# EAGLE board untitled (EAGLE 6.0)
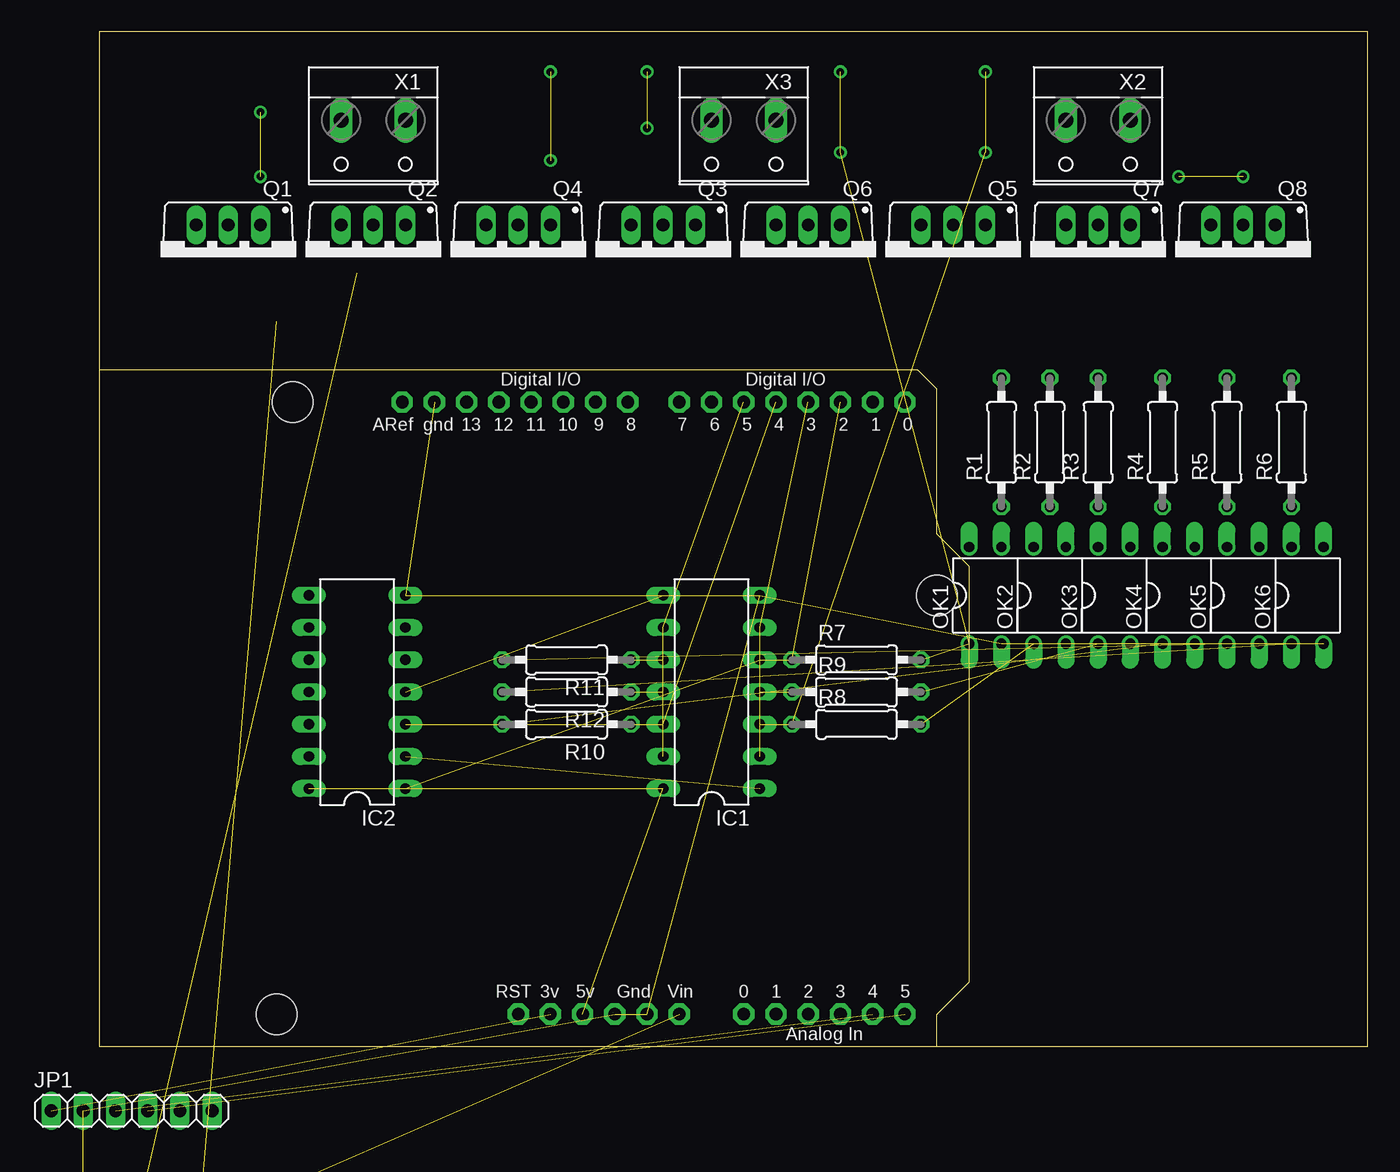
[diagram p0: board, top side]
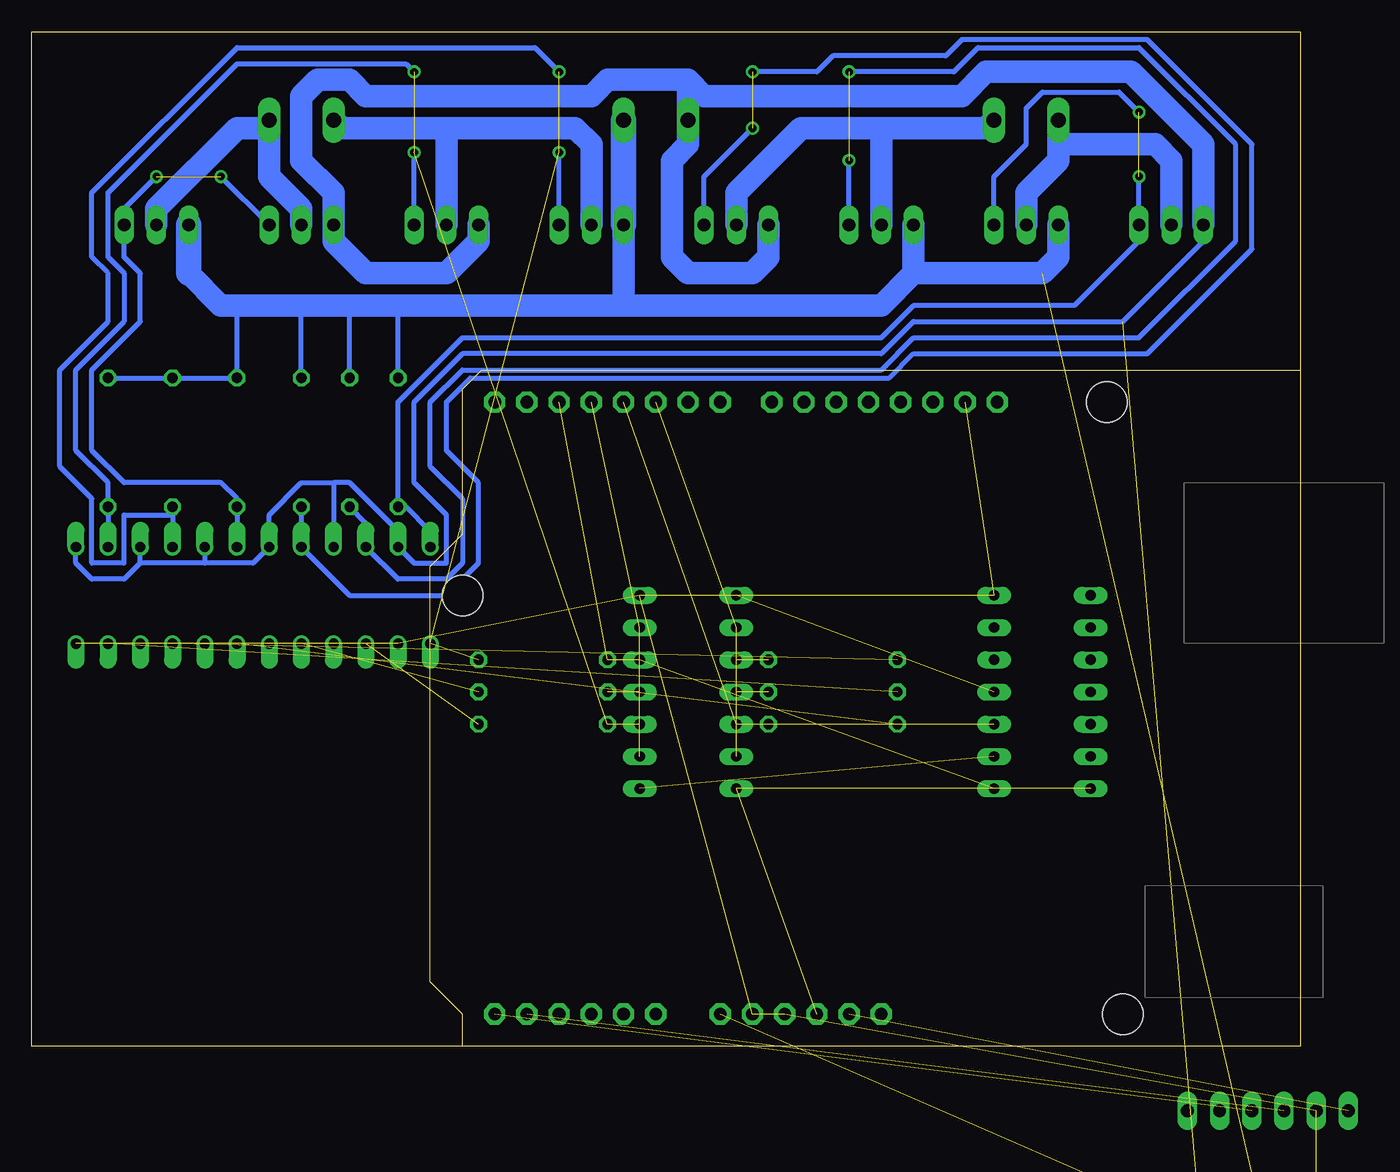
[diagram p1: board, bottom side, seen from below]

Size 100 x 80 mm. Coordinates in mm from the lower left corner, seen from the top.
Outline: 100,0 100,80 0,80 0,0 100,0
Copper layers (1*16): Top 0.035mm / dielectric 1.5mm / Bottom 0.035mm
Design rules: minimum track width 10mil, minimum drill 24mil, track to track 8mil, track to pad 8mil, pad to pad 8mil, via to via 8mil, smd to smd 8mil, copper to edge 40mil, drill to drill 8mil, minimum pad ring 10mil, minimum via ring 8mil, stop-mask expansion 4mil, vias tented up to drill 0mil, thermal gap 10mil

## Footprints (pad centres in the part's own frame; a part is rotated, then mirrored left to right if it is on the bottom)
E7,5-18 = drill 1.016 pad 3.15: + -3.81,0 | drill 1.016 pad 3.15 octagon: - 3.81,0
DIL14 = drill 0.813 long: 1 -7.62,-3.81; 2 -5.08,-3.81; 3 -2.54,-3.81; 4 0,-3.81; 5 2.54,-3.81; 6 5.08,-3.81; 7 7.62,-3.81; 8 7.62,3.81; 9 5.08,3.81; 10 2.54,3.81; 11 0,3.81; 12 -2.54,3.81; 13 -5.08,3.81; 14 -7.62,3.81
1X06 = drill 1.016 long: 1 -6.35,0; 2 -3.81,0; 3 -1.27,0; 4 1.27,0; 5 3.81,0; 6 6.35,0
1X02 = drill 1.016 long: 1 -1.27,0; 2 1.27,0
DIL04 = drill 0.813 offset: 1 -1.27,-3.81; 2 1.27,-3.81; 3 1.27,3.81; 4 -1.27,3.81
TO220BV = drill 1.016 long: D 0,-2.54; G -2.54,-2.54; S 2.54,-2.54
0207/10 = drill 0.813 octagon: 1 -5.08,0; 2 5.08,0
ARDUINO = drill 1 pad 1.676 octagon: 3V 35.56,2.54; 5V 38.1,2.54; A0 50.8,2.54; A1 53.34,2.54; A2 55.88,2.54; A3 58.42,2.54; A4 60.96,2.54; A5 63.5,2.54; AREF 23.876,50.8; D0 63.5,50.8; D1 60.96,50.8; D2 58.42,50.8; D3 55.88,50.8; D4 53.34,50.8; D5 50.8,50.8; D6 48.26,50.8; D7 45.72,50.8; D8 41.656,50.8; D9 39.116,50.8; D10 36.576,50.8; D11 34.036,50.8; D12 31.496,50.8; D13 28.956,50.8; GND 26.416,50.8; GND1 43.18,2.54; GND2 40.64,2.54; RESET 33.02,2.54; VIN 45.72,2.54 | hole 3.2: 15.24,50.8; 66.04,35.56; 13.97,2.54
W237-132 = drill 1.194 long: 1 -2.54,-0.635; 2 2.54,-0.635

## Placement (x,y rotation side)
C1  [E7,5-18]  2.54,-31.75 0 top  (outside the outline)
IC1  4081N  [DIL14]  48.26,27.94 90 top
IC2  4069N  [DIL14]  20.32,27.94 90 top
JP1  Gyro  [1X06]  2.54,-5.08 0 top  (outside the outline)
JP3  9V Batt  [1X02]  -2.54,-19.05 0 top  (outside the outline)
OK1  PC817  [DIL04]  69.85,35.56 0 top
OK2  PC817  [DIL04]  74.93,35.56 0 top
OK3  PC817  [DIL04]  80.01,35.56 0 top
OK4  PC817  [DIL04]  85.09,35.56 0 top
OK5  PC817  [DIL04]  90.17,35.56 0 top
OK6  PC817  [DIL04]  95.25,35.56 0 top
Q1  IRFZ48V  [TO220BV]  10.16,62.23 180 top
Q2  IRF4905V  [TO220BV]  21.59,62.23 180 top
Q3  IRFZ48V  [TO220BV]  44.45,62.23 180 top
Q4  IRF4905V  [TO220BV]  33.02,62.23 180 top
Q5  IRFZ48V  [TO220BV]  67.31,62.23 180 top
Q6  IRF4905V  [TO220BV]  55.88,62.23 180 top
Q7  IRFZ48V  [TO220BV]  78.74,62.23 180 top
Q8  IRF4905V  [TO220BV]  90.17,62.23 180 top
R1  10k  [0207/10]  71.12,47.62 90 top
R2  10k  [0207/10]  74.93,47.62 90 top
R3  10k  [0207/10]  78.74,47.62 90 top
R4  10k  [0207/10]  83.82,47.62 90 top
R5  10k  [0207/10]  88.9,47.62 90 top
R6  10k  [0207/10]  93.98,47.62 90 top
R7  [0207/10]  59.69,30.48 0 top
R8  [0207/10]  59.69,25.4 0 top
R9  [0207/10]  59.69,27.94 0 top
R10  [0207/10]  36.83,25.4 180 top
R11  [0207/10]  36.83,30.48 180 top
R12  [0207/10]  36.83,27.94 180 top
U$1  ARDUINOUNO  [ARDUINO]  0,0 0 top
X1  [W237-132]  21.59,72.39 180 top
X2  [W237-132]  78.74,72.39 180 top
X3  24V Batt  [W237-132]  50.8,72.39 180 top

## Library data of the parts
C1 R1-R12 = rcl
IC1 IC2 = 40xx
JP1 JP3 = pinhead
OK1-OK6 = optocoupler; MPN: PC817X4J000F; OC_FARNELL: 9707727; OC_NEWARK: 97K7059
Q1-Q8 = transistor-power
U$1 = adafruit
X1-X3 = con-wago-508; OC_FARNELL: unknown; OC_NEWARK: unknown

## Nets
GND: IC1.7 IC2.7 JP1.2 JP3.2 OK1.2 OK2.2 OK3.2 OK4.2 OK5.2 OK6.2 U$1.GND U$1.GND1 U$1.GND2
N$1: Q5.D Q6.D X2.2
N$2: Q3.D Q4.D X1.1
N$3: OK2.1 R8.2
N$4: Q1.D Q2.D X1.2
N$5: OK4.1 R10.2
N$7: IC1.9 IC1.13 U$1.D5
N$8: IC1.1 IC2.2
N$9: OK2.4 Q4.G R2.1
N$10: IC1.5 IC2.1 R7.1 U$1.D2
N$11: IC1.2 IC1.6 U$1.D3
N$12: OK1.4 Q1.G Q2.G R1.1
N$13: OK3.4 Q3.G R3.1
N$14: OK3.1 R9.2
N$15: IC1.3 R8.1
N$16: IC1.8 IC2.4
N$17: IC1.4 R9.1
N$18: Q7.D Q8.D X2.1
N$19: OK4.4 Q7.G Q8.G R4.1
N$20: OK5.1 R11.2
N$21: OK5.4 Q6.G R5.1
N$22: OK6.4 Q5.G R6.1
N$23: OK6.1 R12.2
N$24: IC1.10 R11.1
N$25: IC1.11 R12.1
N$26: JP1.4 U$1.A5
N$27: IC1.12 IC2.3 R10.1 U$1.D4
N$28: OK1.1 R7.2
N$29: C1.- OK1.3 OK2.3 OK3.3 OK4.3 OK5.3 OK6.3 Q1.S Q3.S Q5.S Q7.S X3.2
N$30: C1.+ Q2.S Q4.S Q6.S Q8.S R1.2 R2.2 R3.2 R4.2 R5.2 R6.2 X3.1
N$35: JP1.1 U$1.3V
N$37: JP1.3 U$1.A4
N$39: JP3.1 U$1.VIN
VCC: IC1.14 IC2.14 U$1.5V

## Tracks (layer width: path | path; a pad name or v marks a point on that pad's centre or on a via)
GND  (12 unrouted)
N$1
  Bottom 1.778: Q6.D 55.88,71.12 57.15,72.39 67.31,72.39 | 67.31,72.39 75.56,72.39 X2.2 | Q5.D 67.31,72.39
N$2
  Bottom 1.778: Q4.D 33.02,72.39 | Q3.D 44.45,67.31 39.37,72.39 33.02,72.39 | X1.1 24.77,72.39 33.02,72.39
N$3  (1 unrouted)
N$4
  Bottom 1.778: Q2.D 21.59,67.31 19.05,69.85 19.05,71.12 | 19.05,71.12 X1.2 | Q1.D 10.16,69.85 11.43,71.12 19.05,71.12
N$5  (1 unrouted)
N$7  (2 unrouted)
N$8  (1 unrouted)
N$9  (via drill 0.6)  (1 unrouted)
  Bottom 0.406: v35.56,76.83 27.3,76.83 25.4,78.74 12.7,78.74 5.08,71.12 5.08,63.5 12.7,55.88 30.48,55.88 33.02,53.34 66.04,53.34 68.58,50.8 68.58,45.72 66.04,43.18 66.04,38.1 67.31,36.83 71.12,36.83 OK2.4 73.66,41.27 R2.1 | Q4.G 35.56,69.85
N$10  (3 unrouted)
N$11  (2 unrouted)
N$12  (via drill 0.6)  (1 unrouted)
  Bottom 0.406: Q2.G 24.13,68.58 21.59,71.12 21.59,73.98 20.32,75.25 14.29,75.25 v12.7,73.66 | v12.7,68.58 Q1.G 12.7,63.5 17.78,58.42 30.48,58.42 33.02,55.88 66.04,55.88 71.12,50.8 R1.1 70.48,42.55 68.58,40.64 OK1.4
N$13  (via drill 0.6)  (1 unrouted)
  Bottom 0.406: R3.1 OK3.4 74.93,35.56 67.31,35.56 64.77,38.1 64.77,44.45 67.31,46.99 67.31,50.8 65.41,52.7 32.38,52.7 30.48,54.61 12.06,54.61 3.81,62.87 3.81,71.12 12.06,79.38 26.67,79.38 27.94,78.11 36.83,78.11 38.1,76.83 v43.18,76.83 | Q3.G 46.99,68.58 43.18,72.39
N$14  (1 unrouted)
N$15  (via drill 0.6)  (2 unrouted)
  other vias: 69.85,70.48
N$16  (1 unrouted)
N$17  (1 unrouted)
N$18
  Bottom 1.778: Q7.D 78.74,66.04 81.28,68.58 81.28,72.39 | Q8.D 90.17,66.04 83.82,72.39 81.28,72.39 | 81.28,72.39 X2.1
N$19  (via drill 0.6)  (1 unrouted)
  Bottom 0.406: OK4.4 R4.1 83.82,43.18 85.09,44.45 92.71,44.45 95.25,46.99 95.25,53.34 91.44,57.15 91.44,60.96 92.71,62.23 Q8.G 92.71,66.04 v90.17,68.58 | Q7.G v85.09,68.58
N$20  (1 unrouted)
N$21  (1 unrouted)
  Bottom 0.406: 58.42,76.83 60.33,78.74 83.82,78.74 95.25,67.31 95.25,62.23 93.98,60.96 93.98,57.15 97.79,53.34 97.79,45.72 95.25,43.18 95.25,38.1 92.71,38.1 92.71,41.91 88.9,41.91 | Q6.G 58.42,70.48 | R5.1 88.9,41.91 | 88.9,41.91 OK5.4
N$22  (1 unrouted)
  Bottom 0.406: 69.85,76.83 70.48,77.47 83.82,77.47 93.98,67.31 93.98,62.23 92.71,60.96 92.71,57.15 96.52,53.34 96.52,46.99 93.98,44.45 R6.1 OK6.4 | Q5.G 69.85,70.48
N$23  (1 unrouted)
N$24  (1 unrouted)
N$25  (1 unrouted)
N$26  (1 unrouted)
N$27  (3 unrouted)
N$28  (via drill 0.6)  (2 unrouted)
  other vias: 58.42,70.48
N$29  (1 unrouted)
  Bottom 0.406: Q1.S 7.62,63.5 13.97,57.15 30.48,57.15 33.02,54.61 66.04,54.61 69.85,50.8 69.85,44.45 67.31,41.91 67.31,38.1 69.85,38.1 OK1.3 71.12,40.64 74.93,44.45 76.2,44.45 | 76.2,44.45 OK2.3 | 76.2,44.45 78.74,44.45 81.28,41.91 OK3.3 82.55,38.1 86.36,38.1 | 86.36,38.1 91.44,38.1 | 91.44,38.1 OK5.3 | OK4.3 86.36,38.1 | 91.44,38.1 92.71,36.83 95.25,36.83 96.52,38.1 OK6.3
  Bottom 1.778: Q5.S 64.77,63.5 67.31,60.96 73.66,60.96 76.2,63.5 Q7.S 76.2,67.31 78.74,69.85 78.74,74.93 77.47,76.2 74.93,76.2 73.66,74.93 55.88,74.93 54.61,76.2 48.26,76.2 | X3.2 48.26,73.66 | Q1.S 7.62,71.12 13.34,76.83 24.77,76.83 26.67,74.93 46.99,74.93 48.26,76.2 | 48.26,76.2 X3.2 | X3.2 48.26,71.12 49.53,69.85 49.53,62.23 48.26,60.96 43.18,60.96 41.91,62.23 Q3.S
N$30  (1 unrouted)
  Bottom 0.406: R6.2 R5.2 84.45,52.7 83.82,53.34 | R1.2 71.12,58.42 | R2.2 74.93,58.42 | R3.2 78.74,58.42 | R4.2 83.82,53.34 | 83.82,53.34 83.82,58.42
  Bottom 1.778: 87.63,60.96 85.09,58.42 83.82,58.42 78.74,58.42 74.93,58.42 71.12,58.42 53.34,58.42 | 30.48,60.96 20.32,60.96 19.05,62.23 Q2.S | Q4.S 30.48,60.96 | 30.48,60.96 33.02,58.42 53.34,58.42 | Q6.S 53.34,58.42
  Bottom 2: 87.63,60.96 Q8.S | X3.1 Q6.S
N$31  (via drill 0.6)
  other vias: 58.42,76.83
N$32  (via drill 0.6)
  other vias: 69.85,76.83
N$33  (via drill 0.6)
  other vias: 35.56,69.85
N$34  (via drill 0.6)
  other vias: 43.18,72.39
N$35  (1 unrouted)
N$37  (1 unrouted)
N$39  (1 unrouted)
VCC  (2 unrouted)